# Altium PCB PCB_NewSim_2_2023-07-09.pcbdoc (part 1 of 3)
Units mil, origin at the board's own origin, x right, y up, seen from the top; angles counter-clockwise.
Board outline 6950 x 7613.07 mil, 2 copper layers (Top Layer, Bottom Layer); 120 components, 161 nets, 571 pads, 250 vias.
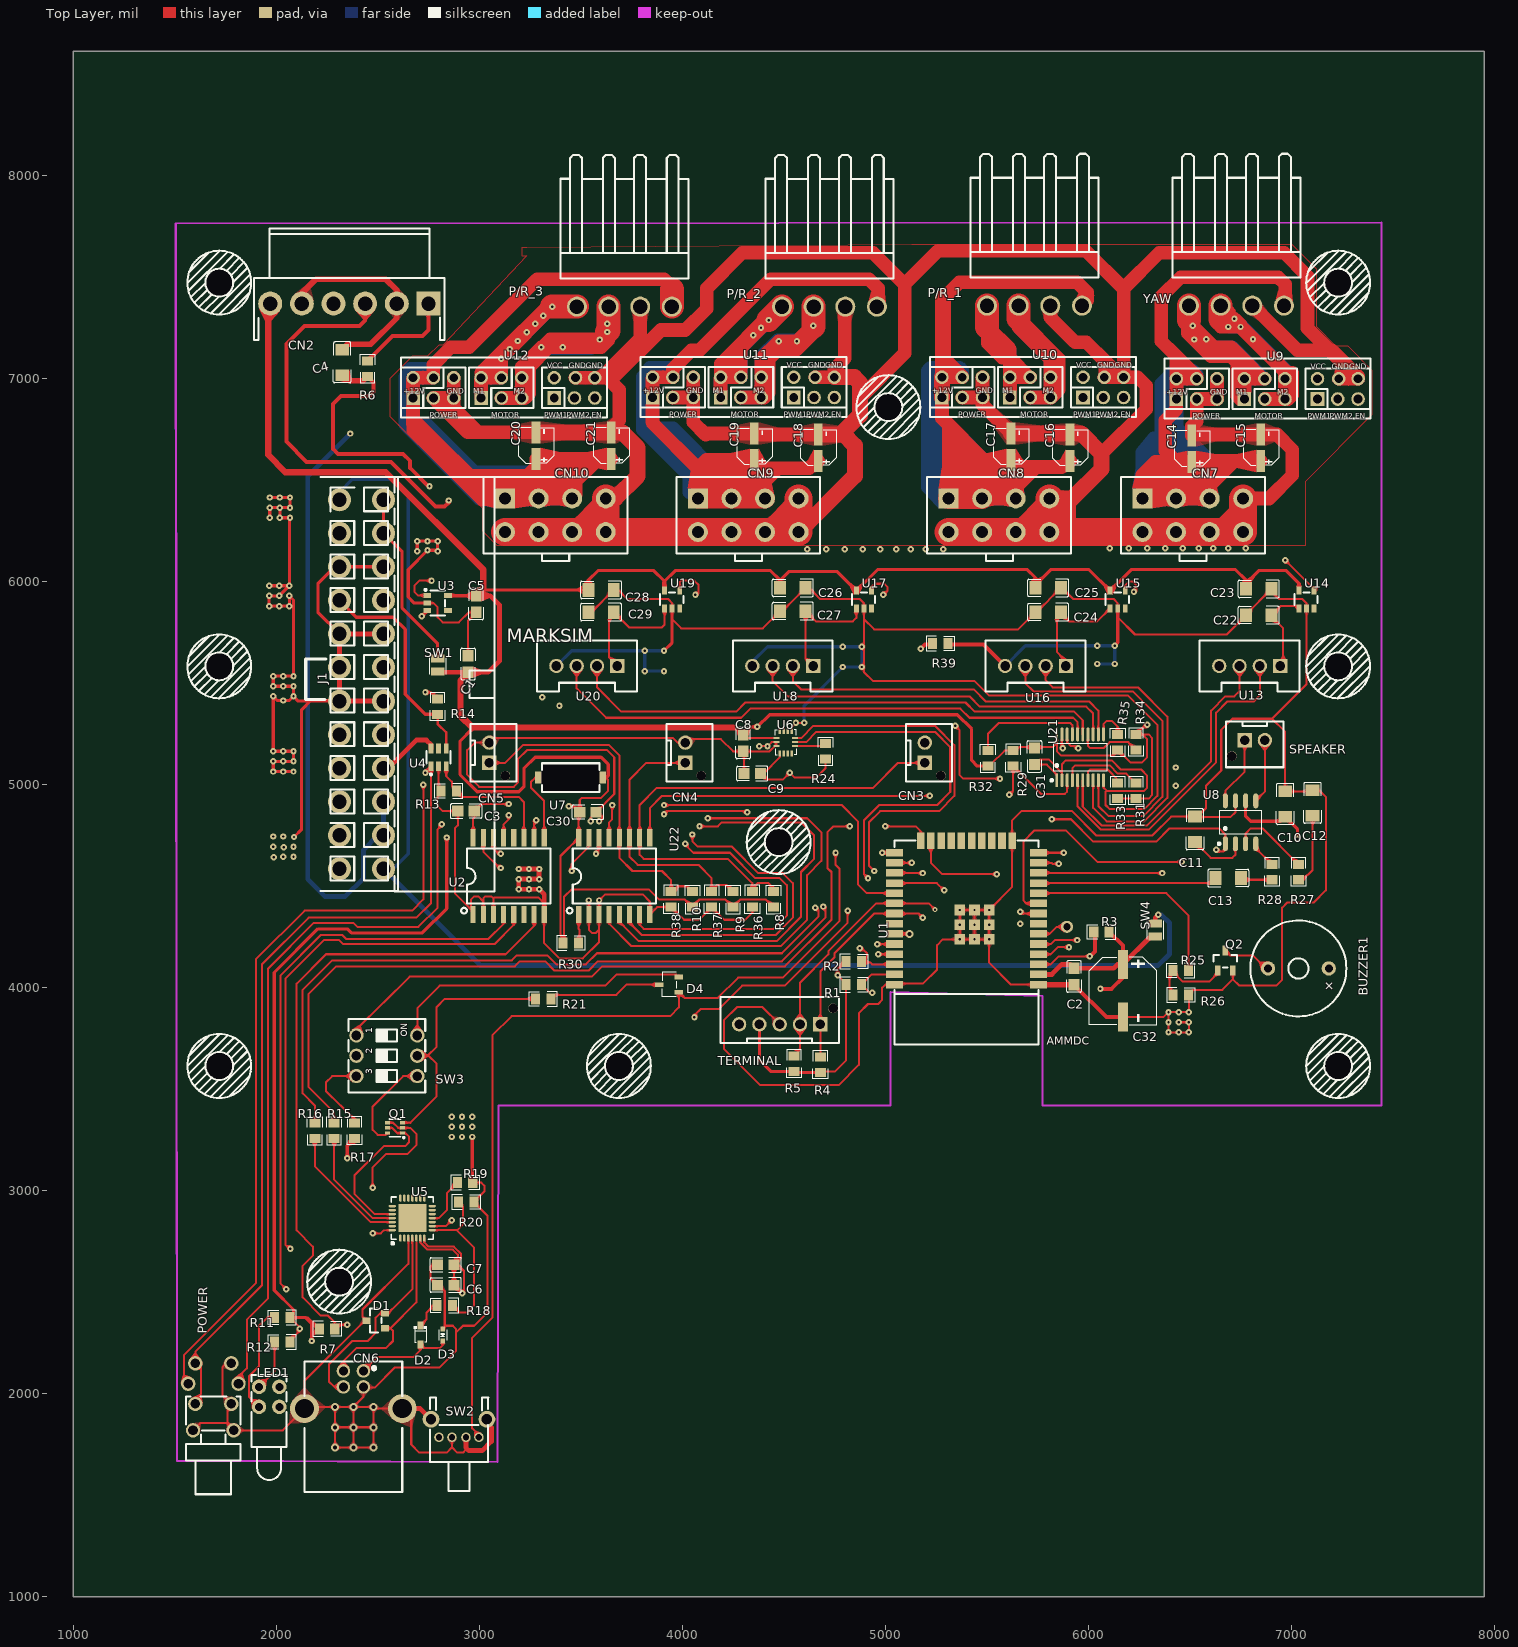
[diagram p0: Top Layer view]
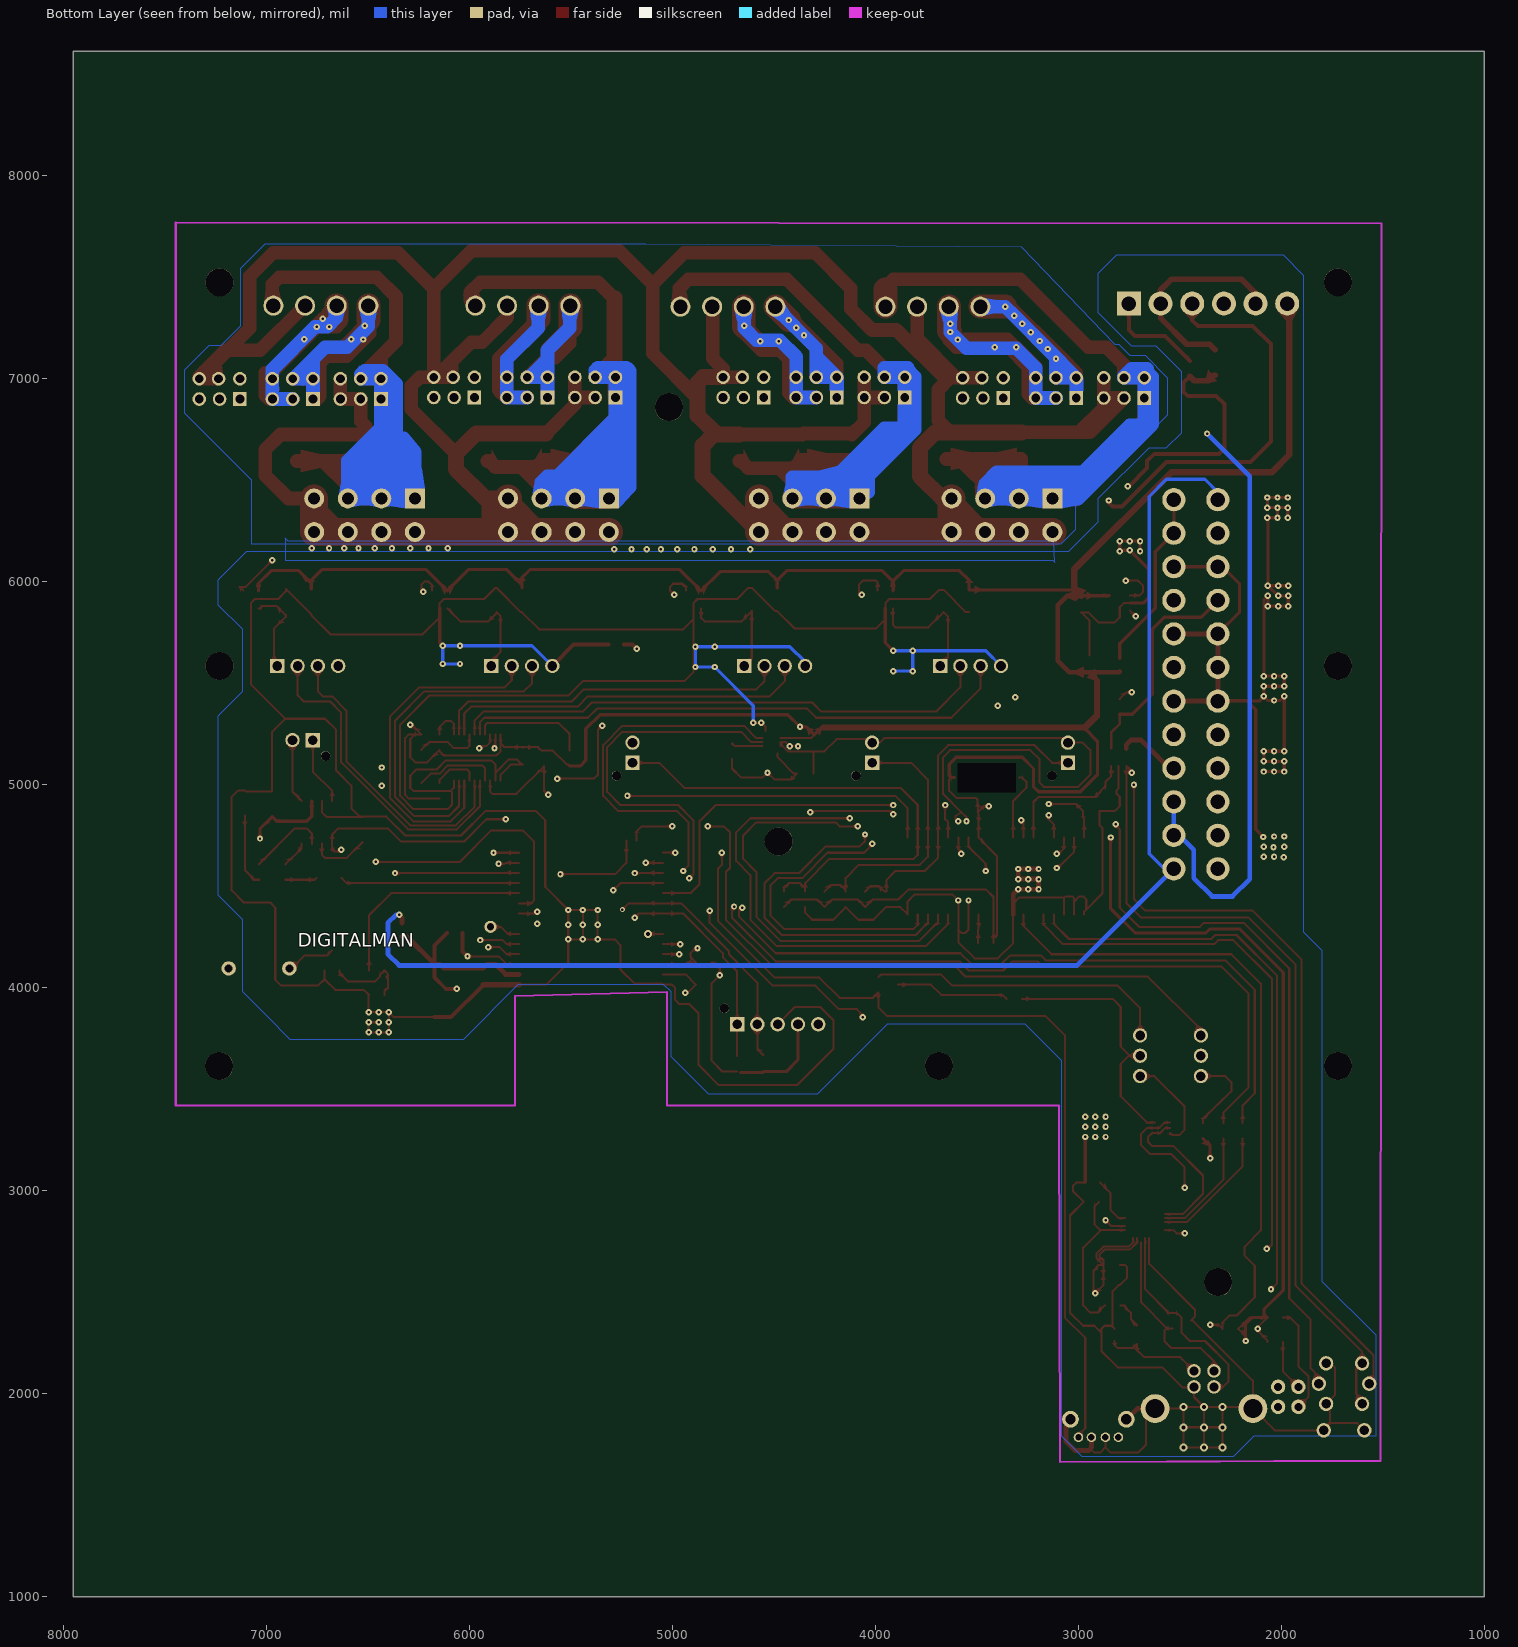
[diagram p1: Bottom Layer view, seen from below]

## Layer stack, top to bottom
Top Layer: signal copper (thickness not stored)
Dielectric: dielectric 12.6, FR-4, Dk 4.8
Bottom Layer: signal copper (thickness not stored)

## Board outline
7950,1000 1000,1000 1000,8613.07 7950,8613.07

## Components (designator, comment, footprint, x,y, rotation, side; value= is the part's Value field where it differs from the comment)
BUZZER1 "HMB1275-05B" BUZ-TH_BD12.0-P7.60-D0.6-FD 7035,4094.93 r180 top
C1 "22uF" C0805 2945,5594.93 r270 top
C2 "22uF" C0805 5930,4054.93 r90 top
C3 "100nF" C0805 2935,4869.93 r180 top
C4 "1uF" C1206 2325,7079.93 r90 top
C5 "100nF" C0805 2985,5889.93 r90 top
C6 "4.7uF" C0805 2835,2534.93 r0 top
C7 "100nF" C0805 2835,2634.93 r0 top
C8 "100nF" C0805 4300,5204.93 r90 top
C9 "100nF" C0805 4345,5054.93 r0 top
C10 "1uF" C1206 6970,4904.93 r90 top
C11 "1uF" C1206 6525,4779.93 r90 top
C12 "1uF" C1206 7105,4909.93 r90 top
C13 "1uF" C1206 6690,4539.93 r180 top
C14 "10uF" CAP-SMD_BD4.0-L4.3-W4.3-FD 6509.98,6654.93 r90 top
C15 "10uF" CAP-SMD_BD4.0-L4.3-W4.3-FD 6849.98,6659.93 r90 top
C16 "10uF" CAP-SMD_BD4.0-L4.3-W4.3-FD 5909.98,6659.93 r90 top
C17 "10uF" CAP-SMD_BD4.0-L4.3-W4.3-FD 5619.98,6664.93 r90 top
C18 "10uF" CAP-SMD_BD4.0-L4.3-W4.3-FD 4669.98,6659.93 r90 top
C19 "10uF" CAP-SMD_BD4.0-L4.3-W4.3-FD 4354.98,6664.93 r90 top
C20 "10uF" CAP-SMD_BD4.0-L4.3-W4.3-FD 3279.97,6669.93 r90 top
C21 "10uF" CAP-SMD_BD4.0-L4.3-W4.3-FD 3649.97,6669.93 r90 top
C22 "1uF" C1206 6840,5834.93 r0 top
C23 "1uF" C1206 6840,5964.93 r0 top
C24 "1uF" C1206 5802.5,5849.93 r0 top
C25 "1uF" C1206 5802.5,5969.93 r0 top
C26 "1uF" C1206 4545,5969.93 r0 top
C27 "1uF" C1206 4545,5854.93 r0 top
C28 "1uF" C1206 3600,5959.93 r0 top
C29 "1uF" C1206 3600,5849.93 r0 top
C30 "100nF" C0805 3535,4864.93 r0 top
C31 "100nF" C0805 5735,5139.93 r270 top
C32 "1000uF" CAP-SMD_BD8.0-L8.3-W8.3-LS9.1-FD 6170,3984.93 r270 top
CN2 "ANALOG_AUX" CONN-TH_HX39601-6WAD 2359.97,7369.93 r180 top
CN3 "PR_SWITCH_1" CONN-TH_B2B-XH-AM-LF-SN 5195,5157.43 r270 top
CN4 "PR_SWITCH_2" CONN-TH_B2B-XH-AM-LF-SN 4015,5157.43 r270 top
CN5 "PR_SWITCH_3" CONN-TH_B2B-XH-AM-LF-SN 3050,5157.43 r270 top
CN6 "USB-B-Female-Port" USB-B_TH_BF90 2380,2019.92 r0 top
CN7 "Yaw Power" CONN-TH_8P-P4.20_X9357WV-2-04-N2SN 6515.03,6327.45 r0 top
CN8 "Pitch-Roll Power A" CONN-TH_8P-P4.20_X9357WV-2-04-N2SN 5560.03,6327.45 r0 top
CN9 "Pitch-Roll Power B" CONN-TH_8P-P4.20_X9357WV-2-04-N2SN 4325.03,6327.45 r0 top
CN10 "Pitch-Roll Power B" CONN-TH_8P-P4.20_X9357WV-2-04-N2SN 3375.03,6327.45 r0 top
D1 "BST23C032V" SOT-23_L2.9-W1.3-P1.90-LS2.4-BR 2490,2359.93 r0 top
D2 "BAT760-7" SOD-323_L1.8-W1.3-LS2.5-RD 2710,2289.93 r270 top
D3 "LESD5D5.0CT1G" SOD-523_L1.2-W0.8-LS1.6-BI 2820,2289.93 r270 top
D4 "BAT54C" SOT-23-3_L2.9-W1.6-P1.90-LS2.8-BR 3935,4014.93 r0 top
J1 "ATX24RH" ATX24_RIGHT_ANGLE 2420,5494.93 r90 top
LED1 "MHK2396YGGBTD" LED-TH_MHK2396YGGBTD 1965,1984.92 r0 top
P/R_1 "3961R-4P" CONN-TH_4P-P3.96_3961R-4P 5735,7359.93 r0 top
P/R_2 "3961R-4P" CONN-TH_4P-P3.96_3961R-4P 4725,7354.93 r0 top
P/R_3 "3961R-4P" CONN-TH_4P-P3.96_3961R-4P 3715,7354.93 r0 top
POWER "K6-6156F-02" SW-TH_K6-6156F-02 1690,1984.92 r90 top
Q1 "UMH3N" SC-70-6_L2.2-W1.3-P0.65-LS2.1-BR 2585,3309.93 r0 top
Q2 "L2N7002KLT1G" SOT-23-3 6675,4134.93 r0 top
R1 "4.7kΩ" R0805 4845,4014.93 r180 top
R2 "4.7kΩ" R0805 4845,4129.93 r180 top
R3 "10kΩ" R0805 6065,4274.93 r0 top
R4 "4.7kΩ" R0805 4680,3619.93 r90 top
R5 "4.7kΩ" R0805 4550,3624.93 r90 top
R6 "10kΩ" R0805 2450,7049.93 r270 top
R7 "10kΩ" R0805 2250,2319.93 r180 top
R8 "10kΩ" R0805 4450,4434.93 r270 top
R9 "10kΩ" R0805 4250,4434.93 r270 top
R10 "10kΩ" R0805 4050,4434.93 r270 top
R11 "330" R0805 2030,2374.93 r0 top
R12 "330" R0805 2030,2254.93 r0 top
R13 "10kΩ" R0805 2850,4969.93 r0 top
R14 "330" R0805 2795,5384.93 r90 top
R15 "0" R0805 2285,3294.93 r270 top
R16 "0" R0805 2190,3294.93 r270 top
R17 "2kΩ" R0805 2385,3294.93 r90 top
R18 "22.1K" R0805 2830,2434.93 r0 top
R19 "10kΩ" R0805 2930,3039.93 r180 top
R20 "47.5kΩ" R0805 2935,2944.93 r180 top
R21 "220" R0805 3315,3944.93 r0 top
R24 "10kΩ" R0805 4705,5164.93 r270 top
R25 "330" R0805 6455,4084.93 r0 top
R26 "10kΩ" R0805 6455,3964.93 r180 top
R27 "12kΩ" R0805 7035,4569.93 r90 top
R28 "12kΩ" R0805 6905,4569.93 r90 top
R29 "1.8kΩ" R0805 5630,5129.93 r90 top
R30 "4.7kΩ" R0805 3450,4219.93 r180 top
R31 "4.7kΩ" R0805 6235,4969.93 r90 top
R32 "4.7kΩ" R0805 5505,5129.93 r270 top
R33 "4.7kΩ" R0805 6145,4969.93 r90 top
R34 "4.7kΩ" R0805 6235,5209.93 r90 top
R35 "4.7kΩ" R0805 6145,5209.93 r270 top
R36 "10kΩ" R0805 4345,4434.93 r90 top
R37 "10kΩ" R0805 4145,4434.93 r90 top
R38 "10kΩ" R0805 3945,4434.93 r90 top
R39 "10kΩ" R0805 5270,5694.93 r180 top
SPEAKER "B2B-XH-AM (LF)(SN)" CONN-TH_B2B-XH-AM-LF-SN 6820,5219.93 r180 top
SW1 "DFP201612NF-2R2M" IND-SMD_L2.0-W1.6 2795,5589.93 r90 top
SW2 "GT-TC193A-H0675-L1" SW-TH_GT-TC193A-H0675-L1 2900,1829.92 r0 top
SW3 "DSWB03LHGET" SW-TH_DSWB03LHGET 2545,3664.93 r270 top
SW4 "DFP201612NF-2R2M" IND-SMD_L2.0-W1.6 6330,4284.93 r90 top
TERMINAL "LCD_I2C" CONN-TH_B5B-XH-AM-LF-SN 4480,3819.93 r0 top
U1 "ESP32-WROOM-32E(4MB)" WIFI-SMD_ESP32-WROOM-32E 5400,4369.93 r90 top
U2 "PCF8574T_C2973152" SO-16_L10.3-W7.5-P1.27-LS10.3-BL 3145,4549.93 r0 top
U3 "TPS3823-33DBVR" SOT-23-5_L3.0-W1.7-P0.95-LS2.8-BR 2795,5894.93 r180 top
U4 "MAX16054AZT+T" TSOT-23-6_L2.9-W1.6-P0.95-LS2.8-TL 2800,5134.93 r90 top
U5 "CP2102-GMR" QFN-28_L5.0-W5.0-P0.50-BL-EP 2670,2864.93 r0 top
U6 "LSM6DS3TR" LGA-14_L3.0-W2.5-P0.50-TL 4510,5209.93 r270 top
U7 "SQ-SEN-200-MTR" SW-SMD_SQ-SEN-200-MTR 3450,5034.93 r0 top
U8 "HT6873" SOP-8_L4.9-W3.9-P1.27-LS6.0-BL 6750,4814.93 r0 top
U9 "MOTOR_DRIVER_150w" MOTOR_DRIVE_150W_MODULE 6930,6959.93 r0 top
U10 "MOTOR_DRIVER_150w" MOTOR_DRIVE_150W_MODULE 5775,6967.43 r0 top
U11 "MOTOR_DRIVER_150w" MOTOR_DRIVE_150W_MODULE 4350,6967.43 r0 top
U12 "MOTOR_DRIVER_150w" MOTOR_DRIVE_150W_MODULE 3170,6964.93 r0 top
U13 "B04B-XASK-1(LF)(SN)" CONN-TH_B04B-XASK-1-LF-SN 6795,5584.93 r0 top
U14 "WS4601E-5/TR" SOT-23-5_L2.9-W1.6-P0.95-LS2.8-BL 7075,5912.43 r0 top
U15 "WS4601E-5/TR" SOT-23-5_L2.9-W1.6-P0.95-LS2.8-BL 6145,5912.43 r0 top
U16 "B04B-XASK-1(LF)(SN)" CONN-TH_B04B-XASK-1-LF-SN 5740,5584.93 r0 top
U17 "WS4601E-5/TR" SOT-23-5_L2.9-W1.6-P0.95-LS2.8-BL 4895,5912.43 r0 top
U18 "B04B-XASK-1(LF)(SN)" CONN-TH_B04B-XASK-1-LF-SN 4495,5584.93 r0 top
U19 "WS4601E-5/TR" SOT-23-5_L2.9-W1.6-P0.95-LS2.8-BL 3950,5912.43 r0 top
U20 "B04B-XASK-1(LF)(SN)" CONN-TH_B04B-XASK-1-LF-SN 3530,5584.93 r0 top
U21 "PCA9545APW" TSSOP-20_L6.5-W4.4-P0.65-LS6.4-BL 5960,5134.93 r0 top
U22 "PCF8574T_C2973152" SO-16_L10.3-W7.5-P1.27-LS10.3-BL 3665,4549.93 r0 top
YAW "3961R-4P" CONN-TH_4P-P3.96_3961R-4P 6730,7359.93 r0 top

## Footprints (in the part's own frame and the unit in brackets; to place one, negate y for a bottom-side part, rotate by r counter-clockwise, add the part's x,y. Pads: shape width x height; smd on the part's side, far side on the other; paste and mask are expansions set on the pad)
ATX24_RIGHT_ANGLE [mil]
  round 114.2 hole 70.8 paste+0 mask+2: 1(909,-108.5) 2(744,-108.5) 3(579,-108.5) 4(413,-108.5) 5(248,-108.5) 6(83,-108.5) 7(-83,-108.5) 8(-248,-108.5) 9(-413,-108.5) 10(-579,-108.5) 11(-744,-108.5) 12(-909,-108.5) 13(909,108.5) 14(744,108.5) 15(579,108.5) 16(413,108.5) 17(248,108.5) 18(83,108.5) 19(-83,108.5) 20(-248,108.5) 21(-413,108.5) 22(-579,108.5) 23(-744,108.5) 24(-909,108.5)
  silkscreen extent -1020,-656 1020,-161
BUZ-TH_BD12.0-P7.60-D0.6-FD [mm]
  round 1.8 hole 1 paste+0 mask+0.051: 1(-3.8,0) 2(3.8,0)
  silkscreen extent -6,-6 6,6
C0805 [mm]
  rect 1.41x1.35 smd paste-100 mask+0.051: 1(-1.03,0) 2(1.03,0)
  silkscreen extent -1.96,-0.9 1.96,0.9
C1206 [mm]
  rect 1.485x1.728 smd paste-100 mask+0.051: 1(-1.593,0) 2(1.593,0)
  silkscreen extent -2.56,-1.09 2.56,1.09
CAP-SMD_BD4.0-L4.3-W4.3-FD [mm]
  rect 2.8x1.1 smd paste+0 mask+0.051: 1(-1.66,0) 2(1.66,0)
  silkscreen extent -2.22,-2.23 2.24,2.23
CAP-SMD_BD8.0-L8.3-W8.3-LS9.1-FD [mm]
  rect 3.61x1.26 smd paste+0 mask+0.051: 1(-3.295,0) 2(3.295,0)
  silkscreen extent -4.23,-4.23 4.23,4.23
CONN-TH_4P-P3.96_3961R-4P [mm]
  round 2.5 hole 1.8 paste+0 mask+0.051: 1(-5.941,0) 2(-1.979,0) 3(1.981,0) 4(5.941,0)
  silkscreen extent -8,3.5 8,19
CONN-TH_8P-P4.20_X9357WV-2-04-N2SN [mm]
  rect 2.5x2.5 hole 1.5 paste+0 mask+0.051: 1(-6.3,2.1)
  round 2.5 hole 1.5 paste+0 mask+0.051: 2(-2.1,2.1) 3(2.1,2.1) 4(6.3,2.1) 5(-6.3,-2.1) 6(-2.1,-2.1) 7(2.1,-2.1) 8(6.3,-2.1)
  silkscreen extent -9,-5.71 9,4.8
CONN-TH_B2B-XH-AM-LF-SN [mm]
  rect 1.8x1.8 hole 1.2 paste+0 mask+0.051: 1(1.27,0)
  round 1.8 hole 1.2 paste+0 mask+0.051: 2(-1.27,0)
  round 1.2 hole 1.2 unplated paste+0: ""(2.87,2)
  silkscreen extent -3.6,-2.35 3.6,3.4
CONN-TH_B04B-XASK-1-LF-SN [mm]
  rect 1.8x1.8 hole 1.2 paste+0 mask+0.051: 1(3.81,0)
  round 1.8 hole 1.2 paste+0 mask+0.051: 2(1.27,0) 3(-1.27,0) 4(-3.81,0)
  silkscreen extent -6.25,-3.2 6.25,3.2
CONN-TH_B5B-XH-AM-LF-SN [mm]
  rect 1.8x1.8 hole 1.2 paste+0 mask+0.051: 1(5.08,0)
  round 1.8 hole 1.2 paste+0 mask+0.051: 2(2.54,0) 3(0,0) 4(-2.54,0) 5(-5.08,0)
  round 1.2 hole 1.2 unplated paste+0: ""(6.68,2)
  silkscreen extent -7.41,-2.35 7.41,3.4
CONN-TH_HX39601-6WAD [mm]
  rect 3x3 hole 1.8 paste+0 mask+0.05: 1(-9.9,0)
  round 3 hole 1.8 paste+0 mask+0.05: 2(-5.94,0) 3(-1.98,0) 4(1.98,0) 5(5.94,0) 6(9.9,0)
  silkscreen extent -11.9,-9.4 11.9,4.57
IND-SMD_L2.0-W1.6 [mm]
  rect 1x1.72 smd paste+0 mask+0.051: 1(0.828,0) 2(-0.828,0)
  silkscreen extent -1.14,-1.02 1.14,1.02
LED-TH_MHK2396YGGBTD [mm]
  round 1.8 hole 1 paste+0 mask+0.051: 1(-1.27,1.25) 2(1.27,1.25) 3(-1.27,-1.25) 4(1.27,-1.25)
  silkscreen extent -2.2,-10.4 2.2,2.7
LGA-14_L3.0-W2.5-P0.50-TL [mm]
  rect 0.745x0.28 smd paste+0 mask+0.051: 1(-1.398,0.75) 2(-1.398,0.25) 3(-1.398,-0.25) 4(-1.398,-0.75) 8(1.398,-0.75) 9(1.398,-0.25) 10(1.398,0.25) 11(1.398,0.75)
  rect 0.28x0.745 smd paste+0 mask+0.051: 5(-0.5,-1.147) 6(0,-1.147) 7(0.5,-1.147) 12(0.5,1.147) 13(0,1.147) 14(-0.5,1.147)
  silkscreen extent -2.14,-1.33 1.58,1.33
MOTOR_DRIVE_150W_MODULE [mm]
  rect 1.7x1.7 hole 1.1 paste+0 mask+0.051: 1(-12.597,-1.524) 7(-4.088,-1.524) 13(5.056,-1.524)
  round 1.7 hole 1.1 paste+0 mask+0.051: 2(-12.597,1.016) 3(-10.057,-1.524) 4(-10.057,1.016) 5(-7.517,-1.524) 6(-7.517,1.016) 8(-4.088,1.016) 9(-1.548,-1.524) 10(-1.548,1.016) 11(0.992,-1.524) 12(0.992,1.016) 14(5.056,1.016) 15(7.596,-1.524) 16(7.723,1.016) 17(10.136,-1.524) 18(10.136,1.016)
  silkscreen extent -14.1,-3.94 11.68,3.56
QFN-28_L5.0-W5.0-P0.50-BL-EP [mm]
  oval 0.28x0.9 smd paste+0 mask+0.051: 1(-1.501,-2.5) 2(-1.001,-2.5) 3(-0.501,-2.5) 4(0,-2.5) 5(0.5,-2.5) 6(1.001,-2.5) 7(1.501,-2.5) 15(1.501,2.5) 16(1.001,2.5) 17(0.5,2.5) 18(0,2.5) 19(-0.501,2.5) 20(-1.001,2.5) 21(-1.501,2.5)
  oval 0.9x0.28 smd paste+0 mask+0.051: 8(2.5,-1.501) 9(2.5,-1.001) 10(2.5,-0.5) 11(2.5,0) 12(2.5,0.5) 13(2.5,1.001) 14(2.5,1.501) 22(-2.5,1.501) 23(-2.5,1.001) 24(-2.5,0.5) 25(-2.5,0) 26(-2.5,-0.5) 27(-2.5,-1.001) 28(-2.5,-1.501)
  rect 3.5x3.5 smd paste+0 mask+0.051: 29(0,0)
  silkscreen extent -2.65,-3.3 2.65,2.65
R0805 [mil]
  rect 44.59x54.21 smd paste-3937.01 mask+2: 1(-38.04,0) 2(38.04,0)
  silkscreen extent -69,-36 69,36
SC-70-6_L2.2-W1.3-P0.65-LS2.1-BR [mm]
  rect 0.6x0.42 smd paste+0 mask+0.051: 1(0.95,-0.65) 2(0.95,0) 3(0.95,0.65) 4(-0.95,0.65) 5(-0.95,0) 6(-0.95,-0.65)
  silkscreen extent -0.7,-1.34 1.22,1.1
SO-16_L10.3-W7.5-P1.27-LS10.3-BL [mm]
  rect 0.635x2.16 smd paste+0 mask+0.051: 1(-4.445,-4.8) 2(-3.175,-4.8) 3(-1.905,-4.8) 4(-0.635,-4.8) 5(0.635,-4.8) 6(1.905,-4.8) 7(3.175,-4.8) 8(4.445,-4.8) 9(4.445,4.8) 10(3.175,4.8) 11(1.905,4.8) 12(0.635,4.8) 13(-0.635,4.8) 14(-1.905,4.8) 15(-3.175,4.8) 16(-4.445,4.8)
  silkscreen extent -5.95,-4.68 5.21,3.43
SOD-323_L1.8-W1.3-LS2.5-RD [mm]
  rect 1x0.75 smd paste+0 mask+0.051: 1(-1.173,0) 2(1.173,0)
  silkscreen extent -1.08,-0.8 0.9,0.8
SOD-523_L1.2-W0.8-LS1.6-BI [mm]
  rect 0.6x0.6 smd paste+0 mask+0.051: 1(-0.75,0) 2(0.75,0)
  silkscreen extent -0.65,-0.5 0.65,0.5
SOP-8_L4.9-W3.9-P1.27-LS6.0-BL [mm]
  oval 0.63x1.865 smd paste+0 mask+0.051: 1(-1.905,-2.682) 2(-0.635,-2.682) 3(0.635,-2.682) 4(1.905,-2.682) 5(1.905,2.682) 6(0.635,2.682) 7(-0.635,2.682) 8(-1.905,2.682)
  silkscreen extent -2.82,-2.83 2.58,1.52
SOT-23-3 [mm]
  rect 0.7x1.25 smd paste+0 mask+0.051: 1(-0.95,-1.25) 2(0.95,-1.25) 3(0,1.25)
  silkscreen extent -1.46,-0.9 1.46,0.65
SOT-23-3_L2.9-W1.6-P1.90-LS2.8-BR [mm]
  rect 1.07x0.6 smd paste+0 mask+0.051: 1(1.235,-0.95) 2(1.235,0.95) 3(-1.235,0)
  silkscreen extent -0.88,-1.54 0.88,1.54
SOT-23-5_L2.9-W1.6-P0.95-LS2.8-BL [mm]
  rect 0.6x1 smd paste+0 mask+0.05: 1(-0.95,-1.1) 2(0,-1.1) 3(0.95,-1.1) 4(0.95,1.1) 5(-0.95,1.1)
  silkscreen extent -1.52,-0.7 1.4,0.89
SOT-23-5_L3.0-W1.7-P0.95-LS2.8-BR [mm]
  rect 1x0.6 smd paste+0 mask+0.051: 1(1.3,-0.95) 2(1.3,0) 3(1.3,0.95) 4(-1.3,0.95) 5(-1.3,-0.95)
  silkscreen extent -0.9,-1.78 1.65,1.55
SOT-23_L2.9-W1.3-P1.90-LS2.4-BR [mm]
  rect 1x0.8 smd paste+0 mask+0.051: 1(1.15,-0.95) 2(1.15,0.95) 3(-1.15,0)
  silkscreen extent -0.7,-1.5 0.7,1.5
SW-SMD_SQ-SEN-200-MTR [mm]
  rect 0.8x1.5 smd paste+0 mask+0.051: 1(-4.025,0) 2(4.025,0)
  Multi-Layer board cut-out: -3.625,1.8 -3.625,-1.8 3.625,-1.8 3.625,1.8
  silkscreen extent -3.6,-1.8 3.6,1.8
SW-TH_DSWB03LHGET [mm]
  round 1.8 hole 1.2 paste+0 mask+0.051: 1(-2.54,3.81) 2(0,3.81) 3(2.54,3.81) 4(-2.54,-3.81) 5(0,-3.81) 6(2.54,-3.81)
  silkscreen extent -4.6,-4.8 4.6,4.8
SW-TH_GT-TC193A-H0675-L1 [mm]
  round 1.2 hole 0.8 paste+0 mask+0.05: 1(-2.5,-1.125) 2(-0.875,-1.125) 3(0.875,-1.125) 4(2.5,-1.125)
  round 2.1 hole 1.3 paste+0 mask+0.05: 5(3.5,1.125) 6(-3.5,1.125)
  silkscreen extent -3.65,-7.87 3.68,3.83
SW-TH_K6-6156F-02 [mm]
  round 1.8 hole 1.2 paste+0 mask+0.05: 1(4.19,-2.25) 2(-0.89,-2.25) 3(4.19,2.25) 4(-0.89,2.25) 5(-4.19,-2.54) 6(-4.19,2.54) L1(1.65,-3.15) L2(1.65,3.15)
  silkscreen extent -12.19,-3.4 0.05,3.4
TSOT-23-6_L2.9-W1.6-P0.95-LS2.8-TL [mil]
  rect 48x24.5 smd paste+0 mask+2: 1(-43.31,37.4) 2(-43.31,0) 3(-43.31,-37.4) 4(43.3,-37.4) 5(43.3,0) 6(43.3,37.4)
  silkscreen extent -89,-59 31,59
TSSOP-20_L6.5-W4.4-P0.65-LS6.4-BL [mm]
  oval 0.364x1.742 smd paste+0 mask+0.051: 1(-2.925,-2.871) 2(-2.275,-2.871) 3(-1.625,-2.871) 4(-0.975,-2.871) 5(-0.325,-2.871) 6(0.325,-2.871) 7(0.975,-2.871) 8(1.625,-2.871) 9(2.275,-2.871) 10(2.925,-2.871) 11(2.925,2.871) 12(2.275,2.871) 13(1.625,2.871) 14(0.975,2.871) 15(0.325,2.871) 16(-0.325,2.871) 17(-0.975,2.871) 18(-1.625,2.871) 19(-2.275,2.871) 20(-2.925,2.871)
  silkscreen extent -3.71,-3.02 3.33,1.77
USB-B_TH_BF90 [mm]
  round 1.7 hole 1.1 paste+0 mask+0.051: 1(1.25,2.355) 2(-1.25,2.355) 3(-1.25,0.355) 4(1.25,0.355)
  round 3.6 hole 2.4 paste+0 mask+0.051: 5(-6.116,-2.355) 5(6.116,-2.355)
  silkscreen extent -6.12,-12.78 6.11,3.5
WIFI-SMD_ESP32-WROOM-32E [mm]
  rect 0.95x2.1 smd paste+0 mask+0.051: 1(-9.002,-9) 2(-7.732,-9) 3(-6.462,-9) 4(-5.192,-9) 5(-3.922,-9) 6(-2.652,-9) 7(-1.382,-9) 8(-0.112,-9) 9(1.158,-9) 10(2.428,-9) 11(3.698,-9) 12(4.968,-9) 13(6.238,-9) 14(7.508,-9) 25(7.507,9) 26(6.237,9) 27(4.967,9) 28(3.697,9) 29(2.427,9) 30(1.157,9) 31(-0.113,9) 32(-1.383,9) 33(-2.653,9) 34(-3.923,9) 35(-5.193,9) 36(-6.463,9) 37(-7.733,9) 38(-9.003,9)
  rect 2.1x0.95 smd paste+0 mask+0.051: 15(9.002,-5.715) 16(9.002,-4.445) 17(9.002,-3.175) 18(9.002,-1.905) 19(9.002,-0.635) 20(9.002,0.635) 21(9.002,1.905) 22(9.002,3.175) 23(9.002,4.445) 24(9.002,5.715)
  rect 1.33x1.33 smd paste+0 mask+0.051: 39(-3.338,-2.835) 39(-3.338,-1) 39(-3.338,0.835) 39(-1.503,0.835) 39(-1.503,-2.835) 39(-1.502,-1) 39(0.332,0.835) 39(0.332,-1) 39(0.332,-2.835)
  silkscreen extent -16.48,-9 9.02,9.02

## Free pads (board coordinates)
  round 60 hole 36 paste+0 mask+2: 1(5895,4299.93)
  round 137.8 hole 137.8 unplated paste+0: ""(1720,3614.93) ""(1720,5584.93) ""(1720,7474.93) ""(2310,2549.93) ""(3685,3614.93) ""(4475,4719.93) ""(5015,6859.93) ""(7230,5584.93) ""(7230,7474.93) ""(7231.04,3614.8)

## Via types
v1: diameter 31.5, hole 12, Top Layer to Bottom Layer, tented both sides, 239 vias
v2: diameter 39.37, hole 19.69, Top Layer to Bottom Layer, tented both sides, 10 vias
v3: diameter 24, hole 12, Top Layer to Bottom Layer, tented both sides, 1 vias

## Nets (pads, with @x,y where several pads share a name; then routed paths per layer and width w, separated by ;. In a path a pad name is that pad's centre, name@x,y a point inside that pad or via, vN(x,y) a via of type N, cw(c..) or ccw(c..) an arc to the next point about the centre after c; other vN are vias at no path point)
3.3V: C2.2 C32.1 R3.2 SW4.2 U1.2 | length 1047.6
  Top Layer w19.68: v1(6060,3994.93) 6115,3994.93 6170,4049.92 6170,4114.65 6170,4207.97 R3.2@6108.04,4269.93
  Top Layer w23.62: U1.2@5754.33,4065.5 5820.57,4065.49 5870,4114.93 5910.55,4114.93 C2.2@5930,4095.47 6125,4095.47 6144.17,4114.65 6170,4114.65 6307.67,4252.32 SW4.2@6330,4252.33
5V_STANDBY: J1.9 U4.6 | length 319.7
  Top Layer w23.62: J1.9@2528.5,5081.93 2552,5081.93 2690,5219.93 2740,5219.93 2762.6,5197.32 U4.6@2762.6,5178.23
#LED_A: U2.6
+3.3V: C1.2 C3.1 C5.2 C6.2 C7.2 C8.2 C9.2 C23.1 C25.1 C26.1 C28.1 C30.1 C31.1 CN2.6 R1.2 R2.2 R4.1 R5.1 R7.2 R8.2 R9.2 R10.2 R11.2 R12.2 R17.1 R24.2 R29.2 R30.2 R31.1 R32.2 R33.1 R34.2 R35.2 SW1.2 TERMINAL.4 U2.16 U3.5 U5.6 U5.7 U6.5 U6.8 U7.2 U14.5 U15.5 U17.5 U19.5 U21.20 U22.16 | length 36086.7
  Top Layer w10: R12.2@2068.04,2254.93 2068.04,2262.97 2115,2309.93 v1(2115,2319.93) ; v1(2175,2259.93) 2175,2282.97 R7.2@2211.96,2319.93 2156.96,2374.93 R11.2@2068.04,2374.93 ; U5.6@2709.39,2766.5 2710,2744.93 2745,2709.93 2870,2709.93 2895,2684.93 2895,2674.93 2875.6,2655.43 C7.2@2875.55,2634.93 ; U5.7@2729.09,2766.5 2729.1,2745.82 2750,2724.93 2875,2724.93 2910,2689.93 2910,2669.38 C7.2@2875.55,2634.93 ; v1@2920,2494.93 v1(2915.55,2494.93) ; U2.16@2970,4738.9 2970,4833.82 2975.55,4839.38 C3.1@2975.55,4869.93 3010.55,4904.93 v1(3145,4904.93) ; v1(3440,4894.93) 3464.45,4894.93 C30.1@3494.45,4864.93 3490,4860.48 U22.16@3490,4738.9 3400,4648.9 3400,4259.93 3416.96,4242.97 3416.96,4219.93 3416.96,4446.89 3455,4484.93 3835,4484.93 3885,4434.93 4011.96,4434.93 R10.2@4050,4396.88 4050,4399.93 4085,4434.93 4211.96,4434.93 R9.2@4250,4396.88 4250,4399.93 4285,4434.93 4411.96,4434.93 R8.2@4450,4396.88 ; C30.1@3494.45,4864.93 3495,4924.93 3505,4934.93 3600,4934.93 3635,4969.93 3635,5024.93 3625,5034.93 U7.2@3608.47,5034.93 ; C8.2@4300,5245.48 4315.87,5229.6 U6.5@4464.82,5229.61 ; U6.8@4480.47,5154.9 4480.5,5135.43 4400,5054.93 C9.2@4385.55,5054.93 4415.6,5024.93 4495,5024.93 v1(4530,5059.93) 4555,5034.93 4660,5034.93 4705,5079.93 R24.2@4705,5126.88 ; R4.1@4680,3586.89 4751.95,3586.89 4806.96,3641.89 R1.2@4806.96,4014.93 4806.96,4019.97 v1(4765,4061.93) 4765,4094.93 4795,4124.93 R2.2@4807,4124.93 ; R32.2@5505,5091.88 5513.04,5099.93 5520,5099.93 5588,5167.93 R29.2@5630,5167.93 ; R29.2@5630,5167.97 5643.04,5167.97 5660,5184.93 5730.55,5184.93 C31.1@5735,5180.48 5735,5185.43 5825.6,5185.43 5844.8,5204.73 5844.8,5247.93 5844.8,5165.12 5865,5144.93 6125,5144.93 6145,5164.93 R35.2@6145,5169.93 ; R33.1@6145,4931.88 R31.1@6235,4931.88 6296.96,4931.89 6315,4949.93 6315,5229.93 6297,5247.93 6235,5247.93 6267,5247.93 6290,5224.93 6290,5134.93 6265,5109.93 6207,5109.93 R35.2@6145,5171.88 ; R34.2@6235,5247.97 6281.96,5294.93 v1(6290,5294.93) ; R11.2@2068.04,2374.93 v1@2115,2327.97 ; R11.2@2068.04,2374.93 v1@2115,2327.97 ; v1(2115,2319.93) v1@2115,2327.97 ; v1(2115,2319.93) v1@2115,2327.97 ; C7.2@2875.55,2634.93 C6.2@2875.55,2534.93 v1(2915.55,2494.93) ; C7.2@2875.55,2634.93 2895,2634.93 2925,2604.93 2925,2504.38 v1(2915.55,2494.93)
  Top Layer w15.75: v1(2175,2259.93) 2175,2344.93 2145,2374.93 R11.2@2068.04,2374.93 2085,2391.93 2085,2414.93 1990,2509.93 1990,4074.93 2205,4289.93 2350,4289.93 2370,4269.93 2720,4269.93 2840,4389.93 v1(2840,4739.93) ; v1(2350,3159.93) 2350,3221.89 R17.1@2385,3256.88 ; U3.5@2846.19,5932.32 2848.03,5930.48 C5.2@2985,5930.48 3014.45,5959.93 C28.1@3537.3,5959.93 3537.3,6007.23 3585,6054.93 3860,6054.93 3910,6004.93 3910,5958.34 U19.5@3912.6,5955.73 3912.6,6002.52 3965,6054.93 4434.6,6054.93 4482.3,6007.23 ; 2913.59,5523.02 2913.59,5346.33 2970,5289.93 4255.55,5289.93 C8.2@4300,5245.48 4339.45,5284.93 v1(4370,5284.93) 4430,5344.93 5355,5344.93 5425,5274.93 5425,5119.93 5453.04,5091.89 R32.2@5505,5091.88 ; U7.2@3608.47,5034.93 3625,5034.93 3635,5044.93 3635,5099.93 3600,5134.93 3275,5134.93 3220,5079.93 3220,4989.93 3195,4964.93 2990,4964.93 2905,5049.93 2905,5214.93 2965,5274.93 4270.55,5274.93 C8.2@4300,5245.43 ; TERMINAL.4@4380,3819.93 4380,3644.93 4438,3586.93 R5.1@4550,3586.88 4555,3581.89 R4.1@4661.72,3581.89 ; C26.1@4482.3,5969.93 4482.3,6007.23 ; U17.5@4857.6,5955.73 4763.4,6049.93 4525,6049.93 4482.3,6007.23 ; U17.5@4857.6,5955.73 4961.79,6059.93 5700,6059.93 5739.8,6020.12 C25.1@5739.8,5969.93 5739.8,5984.73 5815,6059.93 6003.41,6059.93 U15.5@6107.6,5955.73 6211.79,6059.93 6725,6059.93 6777.3,6007.62 C23.1@6777.3,5964.93 6777.3,5992.23 6840,6054.93 6975,6054.93 7037.6,5992.32 U14.5@7037.6,5955.73
  Top Layer w23.62: SW1.2@2795,5557.33 2797.95,5554.38 C1.2@2945,5554.37 ; 2965,5274.93 2905,5334.93 2905,5514.43 C1.2@2945,5554.37 ; C5.2@2985,5930.43 3054.4,5930.43 3100,5884.93 3100,5609.93 3044.5,5554.43 C1.2@2945,5554.37
  Top Layer w31.5: CN2.6@1970.2,7369.93 1960,7369.93 1960,6624.93 2045,6539.93 2540,6539.93 3020,6059.93 3020,5965.43 C5.2@2985,5930.43
  Mid-Layer 2 w10: v1(4370,5284.93) 4370,5269.93 4350,5249.93 4350,5169.93 4430,5089.93 4500,5089.93 v1(4530,5059.93) ; v1(6290,5294.93) 6430,5154.93 v1(6430,5084.93) 6430.65,5084.28 v1@6430.65,4989.93
  Mid-Layer 2 w15.75: v1(2175,2259.93) 2355,2439.93 2885,2439.93 2915.55,2470.47 v1(2915.55,2494.93) 2825.55,2584.93 2535,2584.93 2350,2769.93 v1(2350,3159.93) ; v1(2840,4739.93) 3005,4904.93 v1(3145,4904.93) 3185,4864.93 3425,4864.93 3440,4879.93 v1(3440,4894.93) 3585,4894.93 3630,4849.93 3765,4849.93 3905,4989.93 6450,4989.93 6630,4809.93 7030,4809.93 7085,4754.93 7085,4684.93 7065,4664.93 6745,4664.93 6695,4714.93 6575,4714.93 6425,4864.93 4625,4864.93 4600,4839.93 4600,4059.93 4555,4014.93 4430,4014.93 4380,3964.93 TERMINAL.4@4380,3819.93
  other v1: 6430.65,4994.27
+5V: C10.1 CN2.4 J1.4 J1.6 J1.21 J1.22 J1.23 TERMINAL.5 U8.6 | length 10019.9
  Top Layer w15.75: U8.6@6775,4920.53 6775,4844.93 6800,4819.93 6947.7,4819.93 C10.1@6970,4842.23 7030,4782.23 v1(7030,4734.93)
  Mid-Layer 2 w10: J1.23@2311.5,4750.93 J1.22@2311.5,4915.93 J1.21@2311.5,5081.93
  Mid-Layer 2 w15.75: TERMINAL.5@4280,3819.93 4280,4004.93 4355,4079.93 4355,4809.93 4460,4914.93 6425,4914.93 6575,4764.93 7000,4764.93 v1(7030,4734.93)
  Mid-Layer 2 w23.62: CN2.4@2282.01,7369.93 2290,7361.93 2290,6989.93 2430,6849.93 2430,6006.43 J1.4@2528.5,5907.93 2420,5799.43 2420,5644.93 2487,5577.93 J1.6@2528.5,5577.93 2410,5459.43 2410,5144.93 2347,5081.93 J1.21@2311.5,5081.93 J1.22@2311.5,4915.93 J1.23@2311.5,4750.93 2344,4750.93 2415,4679.93 2415,4434.93 2875,3974.93 4140,3974.93 4280,3834.93 TERMINAL.5@4280,3819.93
+12V_PR_A: C16.1 C17.1 CN8.1 CN8.2 CN8.3 P/R_1.4 U10.1 U10.2 U10.4 | length 10186.4
  Top Layer w66.93: U10.1@5279.06,6907.43 5279.06,6805.86 ; 5279.06,7399.93 U10.2@5279.06,7007.43 U10.4@5379.06,7007.43 5379.06,7010.86 5290,7099.93 5290,7399.93 5365,7474.93 5945,7474.93 5995,7424.93 5995,7386.02 P/R_1.4@5968.9,7359.93 ; 5393.91,6691.02 5312,6609.11 5312,6524.6 5397.76,6610.35 5474.57,6610.35 5312,6447.78 CN8.1@5312,6410.12 ; 5642.71,6564.93 CN8.3@5642.71,6410.12 ; 5743.48,6564.93 5642.71,6464.15 CN8.3@5642.71,6410.12 ; C16.1@5910,6594.55 5899.62,6594.55 5870,6564.93 5670,6564.93 5635.38,6599.55 C17.1@5620,6599.55 ; 5279.06,6805.86 5312,6772.93 CN8.1@5312,6410.12 ; 5279.06,6805.86 5495.52,6589.4 5532.29,6589.4 5353.01,6410.12 CN8.1@5312,6410.12 ; 5279.06,6805.86 5485.38,6599.55 C17.1@5620,6599.55 ; CN8.1@5312,6410.12 5431.48,6410.12 5522.15,6500.79 5522.15,6599.55 5642.71,6478.99 CN8.3@5642.71,6410.12 ; CN8.2@5477.35,6410.12 CN8.3@5642.71,6410.12 ; CN8.2@5477.35,6410.12 5620,6552.77 C17.1@5620,6599.55 ; CN8.2@5477.35,6410.12 5526.9,6410.12 5642.71,6525.93 5620,6548.64 C17.1@5620,6599.55 ; CN8.2@5477.35,6410.12 CN8.3@5642.71,6410.12 ; C17.1@5620,6599.55 5620,6432.84 CN8.3@5642.71,6410.12
  Top Layer w78.74: U10.1@5279.06,6907.43 U10.2@5279.06,7007.43
  Top Layer w98.42: CN8.1@5312,6410.12 CN8.2@5477.35,6410.12
  Top Layer w102.36: CN8.1@5312,6410.12 CN8.2@5477.35,6410.12
  Bottom Layer w66.93: U10.1@5279.06,6907.43 U10.2@5279.06,7007.43 U10.4@5379.06,7007.43 ; U10.1@5279.06,6907.43 5279.06,6805.86 5565,6519.93 5615,6519.93 5645,6489.93 5645,6412.41 CN8.3@5642.71,6410.12 CN8.2@5477.35,6410.12 CN8.1@5312,6410.12 ; U10.1@5279.06,6907.43 5279.06,6443.06 CN8.1@5312,6410.12 ; CN8.1@5312,6410.12 5264.8,6410.12 5210,6464.93 5210,7039.93 5225,7054.93 5365,7054.93 5379.06,7040.86 U10.4@5379.06,7007.43 ; CN8.1@5312,6410.12 5274.8,6410.12 5220,6464.93 5220,6974.93 5252.5,7007.43 U10.4@5379.06,7007.43
+12V_PR_B: C18.1 C19.1 CN9.1 CN9.2 CN9.3 P/R_2.4 U11.1 U11.2 U11.4 | length 7749.3
  Top Layer w66.93: 4077,6484.86 4395.88,6484.86 4407.71,6496.69 ; 4077,6521.9 4382.5,6521.9 4407.71,6496.69 ; 4470.95,6559.93 4407.71,6496.69 ; C18.1@4670,6594.55 4659.62,6594.55 4625,6559.93 4400,6559.93 ; P/R_2.4@4958.9,7354.93 4965,7361.02 4965,7444.93 4920,7489.93 4435,7489.93 4085,7139.93 4045,7139.93 3954.06,7048.98 U11.4@3954.05,7007.43 U11.2@3854.05,7007.43 U11.1@3854.05,6907.43 3854.06,6780.86 4077,6557.93 ; 4077,6557.93 4079,6559.93 4400,6559.93 ; 4077,6557.93 CN9.1@4077,6410.12 4077,6557.93 ; 4077,6557.93 4118.62,6599.55 C19.1@4355,6599.55 ; C19.1@4355,6599.55 4355,6462.84 CN9.3@4407.71,6410.12 4407.71,6496.69 ; C19.1@4355,6599.55 4360.38,6599.55 4400,6559.93
  Top Layer w98.42: CN9.1@4077,6410.12 CN9.2@4242.35,6410.12 CN9.3@4407.71,6410.12
  Bottom Layer w66.93: CN9.1@4035,6439.93 4035,6519.93 3805,6749.93 3805,7009.93 3840,7044.93 3840,7054.93 3954.06,7054.93 U11.4@3954.05,7007.43 U11.2@3854.05,7007.43 U11.1@3854.05,6907.43 3854.06,6780.86 ; 3854.06,6780.86 4077,6557.93 CN9.1@4077,6410.12 ; 3854.06,6780.86 3880,6754.93 3955,6754.93 4195,6514.93 4407.71,6514.93 CN9.3@4407.71,6410.12 ; CN9.1@4077,6410.12 CN9.3@4407.71,6410.12 ; CN9.1@4077,6410.12 CN9.2@4242.35,6410.12 CN9.3@4407.71,6410.12
+12V_PR_C: C20.1 C21.1 CN10.1 CN10.2 CN10.3 P/R_3.4 U12.1 U12.2 U12.4 | length 10552
  Top Layer w66.93: U12.4@2774.05,7004.93 U12.2@2674.05,7004.93 U12.1@2674.05,6904.93 ; U12.4@2774.05,7004.93 2774.1,7069.02 2860,7154.93 2950,7154.93 3285,7489.93 3910,7489.93 ; 2953.76,6521.16 3346.61,6521.16 CN10.3@3457.71,6410.12 ; 2994.5,6480.42 3221.99,6480.42 CN10.2@3292.32,6410.1 ; 3528.23,6548.16 3265.03,6548.16 3244.66,6527.79 ; P/R_3.4@3948.9,7354.93 3960,7366.02 3960,7439.93 3910,7489.93 ; 3948.9,7439.93 3948.9,7451.02 3910,7489.93 ; U12.1@2674.05,6904.93 2674.06,6745.86 3015,6404.93 3020.17,6410.1 CN10.1@3127,6410.12 ; U12.1@2674.05,6904.93 2674.06,6800.86 3064.83,6410.1 CN10.1@3127,6410.12 ; CN10.1@3127,6410.12 3280,6563.12 3280,6604.55 3650,6604.55 3584.62,6604.55 3475,6494.93 ; CN10.1@3127,6410.12 CN10.2@3292.32,6410.1 ; 3244.66,6527.79 3507.86,6527.79 ; 3244.66,6527.79 3189.23,6472.35 3452.43,6472.35 3475,6494.93 ; 3244.66,6527.79 3507.86,6527.79 ; CN10.2@3292.32,6410.1 CN10.3@3457.71,6410.12 ; CN10.3@3457.71,6410.12 CN10.3@3475,6427.41 ; CN10.3@3457.71,6410.12 CN10.3@3475,6427.41 ; CN10.3@3475,6427.41 3475,6494.93 ; CN10.3@3475,6427.41 3475,6494.93 ; 3507.86,6527.79 3544.9,6564.82 3507.86,6527.79
  Top Layer w118.11: P/R_3.4@3948.9,7354.93 3948.9,7439.93
  Bottom Layer w66.93: 2665,6794.93 2690,6769.93 2745,6769.93 2975,6539.93 3400,6539.93 3457.71,6482.22 CN10.3@3457.71,6410.12 ; 2665,6794.93 3049.8,6410.12 CN10.1@3127,6410.12 ; 2665,6794.93 2674.06,6803.98 U12.1@2674.05,6904.93 U12.2@2674.05,7004.93 U12.4@2774.05,7004.93 2774.06,7010.86 2735,7049.93 2660,7049.93 2660,7034.93 2635,7009.93 2635,6794.93 2635,6774.93 2999.8,6410.12 CN10.1@3127,6410.12 ; CN10.1@3127,6410.12 CN10.2@3292.35,6410.12 ; CN10.1@3127,6410.12 CN10.2@3292.35,6410.12 ; CN10.2@3292.35,6410.12 CN10.3@3457.71,6410.12 ; CN10.2@3292.35,6410.12 CN10.3@3457.71,6410.12
+12V_VCC: BUZZER1.1 J1.10 J1.11 U9.14 U10.14 U11.14 U12.14 | length 11918.3
  Mid-Layer 1 w23.62: v1(2365,6729.93) 3240,6729.93 3295,6784.93 3295,6964.93 3337.5,7007.43 U12.14@3369.1,7007.43 ; U12.14@3369.06,7007.43 3496.56,7134.93 4455,7134.93 4549.06,7040.86 U11.14@4549.06,7009.93 ; U11.14@4554.06,7007.43 4551.56,7009.93 U11.14@4549.06,7009.93 ; U9.14@7130,6999.93 7130,7074.93 ; BUZZER1.1@7184.61,4094.92 7184.6,4439.52 7235,4489.93 7235,5139.93 7420,5324.93 7420,7064.93 7365,7119.93 7175,7119.93 7130,7074.93 ; U11.14@4549.06,7009.93 4549.06,7048.98 4640,7139.93 5895,7139.93 5974.06,7060.86 U10.14@5974.05,7007.43 5980,7013.36 5980,7059.93 6055,7134.93 7070,7134.93 7130,7074.93
  Bottom Layer w23.62: v1(2365,6729.93) 2155,6519.93 2155,4534.93 2240,4449.93 2340,4449.93 2430,4539.93 2430,4679.93 2501,4750.93 J1.11@2528.5,4750.93 J1.10@2528.5,4915.93
+12V_YAW: C14.1 C15.1 CN7.1 CN7.2 CN7.3 U9.1 U9.2 U9.4 YAW.4 | length 6291.1
  Top Layer w66.93: 6400.82,7144.11 6434.06,7110.52 6534.06,7010.52 U9.4@6534.06,6999.93 U9.2@6434.06,6999.93 U9.1@6434.06,6899.93 ; U9.1@6434.06,6899.93 6434.1,6849.02 6380,6794.93 6380,6644.93 6435.4,6589.52 6510,6589.52 6515.02,6594.55 6719.62,6594.55 ; U9.2@6434.06,6999.93 6434.1,7110.82 6360,7184.93 6360,7404.93 6455,7499.93 6935,7499.93 6970,7464.93 6970,7366.02 YAW.4@6963.9,7359.93 ; C14.1@6510,6589.55 6329.62,6589.55 6267,6526.93 CN7.1@6267,6410.12 CN7.2@6432.35,6410.12 CN7.3@6597.71,6410.12 6597.71,6472.64 6719.62,6594.55 ; C15.1@6850,6594.55 6719.62,6594.55
  Bottom Layer w66.93: 6360,6707.43 6322.5,6707.43 6267,6637.93 CN7.1@6267,6410.12 ; 6360,6729.93 6360,6974.93 6425,7039.93 6515,7039.93 6534.06,7020.86 U9.4@6534.06,6999.93 U9.2@6434.06,6999.93 ; CN7.1@6267,6410.12 6267,6591.93 6434.06,6758.98 ; CN7.1@6267,6410.12 CN7.2@6432.35,6410.12 ; CN7.2@6432.35,6410.12 6390,6452.48 6390,6949.93 6434.06,6993.98 U9.2@6434.06,6999.93 ; CN7.2@6432.35,6410.12 CN7.3@6597.71,6410.12 6597.71,6595.34 6434.06,6758.98 ; 6434.06,6758.98 U9.1@6434.06,6899.93 U9.2@6434.06,6999.93
A_OUT-A_PR: P/R_1.1 U10.7 U10.8 U10.10 | length 2094.2
  Top Layer w66.93: P/R_1.1@5501.1,7359.93 5505,7356.02 5505,7254.93 ; U10.7@5614.06,6907.43 U10.8@5614.06,7007.43 ; 5505,7254.93 5505,7174.93 5576.89,7103.03 5614.06,7103.03 ; 5505,7254.93 5614.06,7145.86 U10.8@5614.06,7007.43 ; U10.8@5614.06,7007.43 5614.06,7103.03 ; U10.8@5614.06,7007.43 U10.10@5714.06,7007.43 ; U10.8@5614.06,7007.43 U10.10@5714.06,7007.43 ; 5614.06,7103.03 5709.67,7007.43 U10.10@5714.06,7007.43
  Top Layer w118.11: 5501.1,7254.93 P/R_1.1@5501.1,7359.93
  Bottom Layer w10: U10.8@5614.06,7007.43 U10.10@5714.06,7007.43
  Bottom Layer w66.93: P/R_1.1@5501.1,7359.93 5505,7356.02 5505,7249.93 5614.06,7140.86 U10.8@5614.06,7007.43 ; U10.7@5614.06,6907.43 U10.8@5614.06,7007.43 ; 5614.06,7095.63 5702.27,7007.43 U10.10@5714.06,7007.43 U10.8@5614.06,7007.43
A_OUT-B_PR: P/R_1.2 U10.9 U10.11 U10.12 | length 1790.2
  Top Layer w66.93: 5657.1,7296.59 5855,7098.69 5855,6944.93 5817.5,6907.43 U10.11@5814.06,6907.43 ; P/R_1.2@5657.1,7359.93 5655,7357.82 5655,7254.93 5814.06,7095.86 U10.12@5814.06,7007.43 U10.11@5814.06,6907.43 ; U10.9@5714.06,6907.43 U10.11@5814.06,6907.43
  Top Layer w118.11: 5657.1,7296.59 P/R_1.2@5657.1,7359.93
  Bottom Layer w66.93: P/R_1.2@5657.1,7359.93 5660,7357.02 5660,7249.93 5814.06,7095.86 U10.12@5814.06,7007.43 U10.11@5814.06,6907.43 U10.9@5714.06,6907.43
A_PR_PWM_A: U1.12 U10.13 | length 5132.6
  Top Layer w10: U1.12@5754.33,4565.5 v1(6365,4564.93)
  Mid-Layer 2 w10: U10.13@5974.05,6907.43 5974.06,6795.86 6100,6669.93 7205,6669.93 7260,6614.93 7260,5884.93 7095,5719.93 7095,5404.93 7140,5359.93 7225,5359.93 7260,5324.93 7260,4704.93 7120,4564.93 v1(6365,4564.93)
A_PR_PWM_B: U1.23 U10.15 | length 6001.4
  Top Layer w10: U1.23@5224.99,4724.35 5225,4614.93 5280,4559.93 v1(5550,4559.93)
  Mid-Layer 2 w10: v1(5550,4559.93) 5755,4764.93 5940,4764.93 6180,4524.93 7135,4524.93 7300,4689.93 7300,5359.93 7255,5404.93 7170,5404.93 7130,5444.93 7130,5699.93 7295,5864.93 7295,6639.93 7220,6714.93 6145,6714.93 6074.1,6785.82 U10.15@6074.05,6907.43
ADC0: C4.1 R6.2 U1.4 | length 9365.2
  Top Layer w10: U1.4@5754.33,4165.5 5815,4164.93 5850,4199.93 v1(5905,4199.93)
  Top Layer w19.68: R6.2@2450,7011.88 2480,6981.93 2480,6934.93 2460,6914.93 2320,6914.93 2280,6874.93 2280,6654.93 2305,6629.93 2625,6629.93 2660,6594.93 2660,6559.93 2750,6469.93 v1(2755,6469.93)
  Top Layer w27.56: C4.1@2325,7017.23 2332.7,7017.23 2360,6989.93 2428.04,6989.93 R6.2@2450,7011.88
  Mid-Layer 1 w10: v1(2755,6469.93) 2755,6526.13 2778.79,6549.93 7085,6549.93 7195,6439.93 7195,5814.93 7130,5749.93 6450,5749.93 6365,5664.93 6365,4934.93 6110,4679.93 6110,4149.93 6070,4109.93 5995,4109.93 v1(5905,4199.93)
AUDIO_MODE: U2.10 U8.1 | length 4215.9
  Top Layer w10: U2.10@3270,4738.9 3270,4804.93 3280,4814.93 v1(3280,4824.93) ; v1(5820,4829.93) 5915,4829.93 6025,4719.93 6335,4719.93 6400,4784.93 6645,4784.93 6675,4754.93 U8.1@6675,4709.31 6675,4679.93 6665,4669.93 6640,4669.93 v1(6630,4679.93)
  Mid-Layer 1 w10: v1(3280,4824.93) 3500,4824.93 3610,4934.93 3935,4934.93 3965,4904.93 3965,4669.93 3980,4654.93 4200,4654.93 4235,4689.93 4235,4839.93 4295,4899.93 5750,4899.93 v1(5820,4829.93)
AUX: CN2.3 U1.5 | length 10790.1
  Top Layer w10: U1.5@5754.33,4215.5 5815,4214.93 5835,4234.93 v1(5945,4234.93)
  Top Layer w19.68: CN2.3@2437.92,7369.93 2437.9,7287.82 2410,7259.93 2140,7259.93 2050,7169.93 2050,6689.93 2150,6589.93 2565,6589.93 2785,6369.93 2829.9,6369.93 2849.9,6389.73 v1(2850,6399.93)
  Mid-Layer 1 w10: v1(2850,6399.93) 2815.3,6364.93 2740,6364.93 2705,6399.93 2705,6539.93 2750,6584.93 7095,6584.93 7220,6459.93 7220,5799.93 7140,5719.93 6490,5719.93 6412.5,5642.43 6412.5,5197.43 6485,5124.93 6485,4969.93 6445,4929.93 6395,4929.93 6140,4674.93 6140,4119.93 6100,4079.93 5965,4079.93 5860,4184.93 5860,4229.93 5880,4249.93 5930,4249.93 v1(5945,4234.93)
B_OUT-A_PR: P/R_2.1 U11.7 U11.8 U11.10 | length 2498.3
  Top Layer w66.93: U11.7@4189.06,6907.43 U11.8@4189.06,7007.43 ; 4289.06,7090.26 4206.23,7007.43 U11.8@4189.06,7007.43 ; U11.8@4189.06,7007.43 4189.06,7073.98 4440,7324.93 4461.1,7324.93 P/R_2.1@4491.1,7354.93 ; U11.8@4189.06,7007.43 4195,7013.36 4195,7054.93 4289.06,7148.98 4289.06,7152.89 ; U11.8@4189.06,7007.43 U11.10@4289.06,7007.43 4289.06,7152.89 ; 4289.06,7152.89 v1(4350.44,7214.27) v1(4387.78,7251.6) v1(4425.11,7288.94) ; v1(4425.11,7288.94) P/R_2.1@4491.1,7354.93 ; v1(4425.11,7288.94) P/R_2.1@4491.1,7354.93
  Top Layer w118.11: v1(4425.11,7288.94) P/R_2.1@4491.1,7354.93
  Bottom Layer w66.93: U11.10@4289.06,7007.43 U11.8@4189.06,7007.43 ; U11.10@4289.06,7007.43 4290,7149.93 4491.1,7351.02 P/R_2.1@4491.1,7354.93 ; 4289.74,7109.22 4189.06,7008.54 U11.8@4189.06,7007.43 ; U11.8@4189.06,7007.43 U11.7@4189.06,6907.43 U11.8@4189.06,7007.43
B_OUT-B_PR: P/R_2.2 U11.9 U11.11 U11.12 | length 2357
  Top Layer w66.93: U11.9@4289.06,6907.43 U11.11@4389.06,6907.43 ; 4468.16,7139.91 4559.98,7139.91 4645,7224.93 ; 4513.18,7184.93 4425,7096.75 4425,6929.93 4402.5,6907.43 U11.11@4389.06,6907.43 ; v1@4564.93,7184.93 4647.1,7267.1 4647.1,7279.77 P/R_2.2@4645,7352.82 ; U11.11@4389.06,6907.43 U11.12@4389.06,7007.43 4389.06,7098.98 v1(4475,7184.93) v1(4565,7184.93) 4605,7184.93 4645,7224.93 ; 4645,7224.93 v1(4645,7260.73) P/R_2.2@4645,7352.82 ; P/R_2.2@4645,7352.82 P/R_2.2@4647.1,7354.93 P/R_2.2@4645,7352.82
  Top Layer w118.11: v1@4647.1,7257.48 P/R_2.2@4647.1,7354.93 4647.1,7301.48
  Bottom Layer w66.93: U11.9@4289.06,6907.43 U11.11@4389.06,6907.43 U11.12@4389.06,7007.43 4389.06,7108.98 4470,7189.93 4585,7189.93 4645,7249.93 4645,7352.82 P/R_2.2@4647.1,7354.93